# Altium PCB uart-keyboard.PcbDoc
Units mil, origin at the board's own origin, x right, y up, seen from the top; angles counter-clockwise.
Board outline 2000 x 2600 mil, 2 copper layers (Top Layer, Bottom Layer); 34 components, 24 nets, 127 pads, 13 vias.
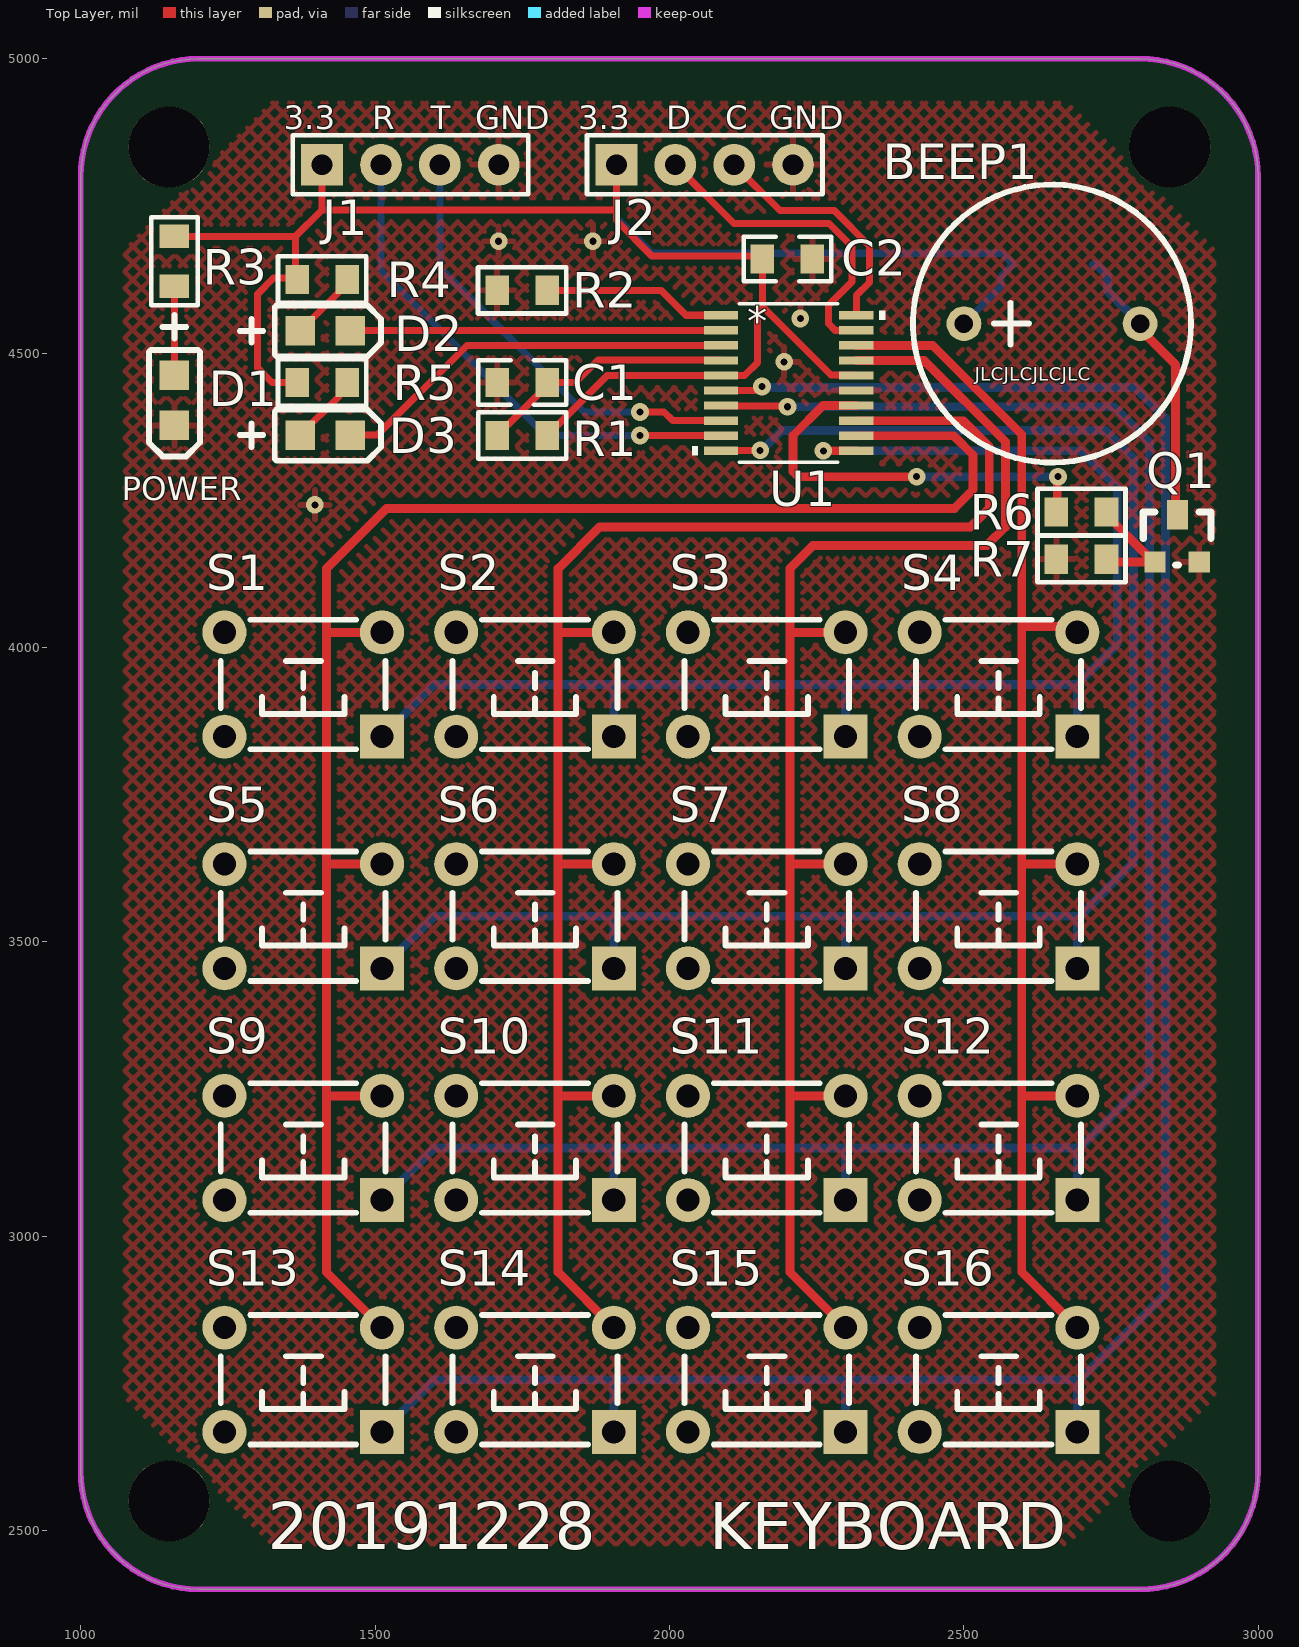
[diagram p0: Top Layer view]
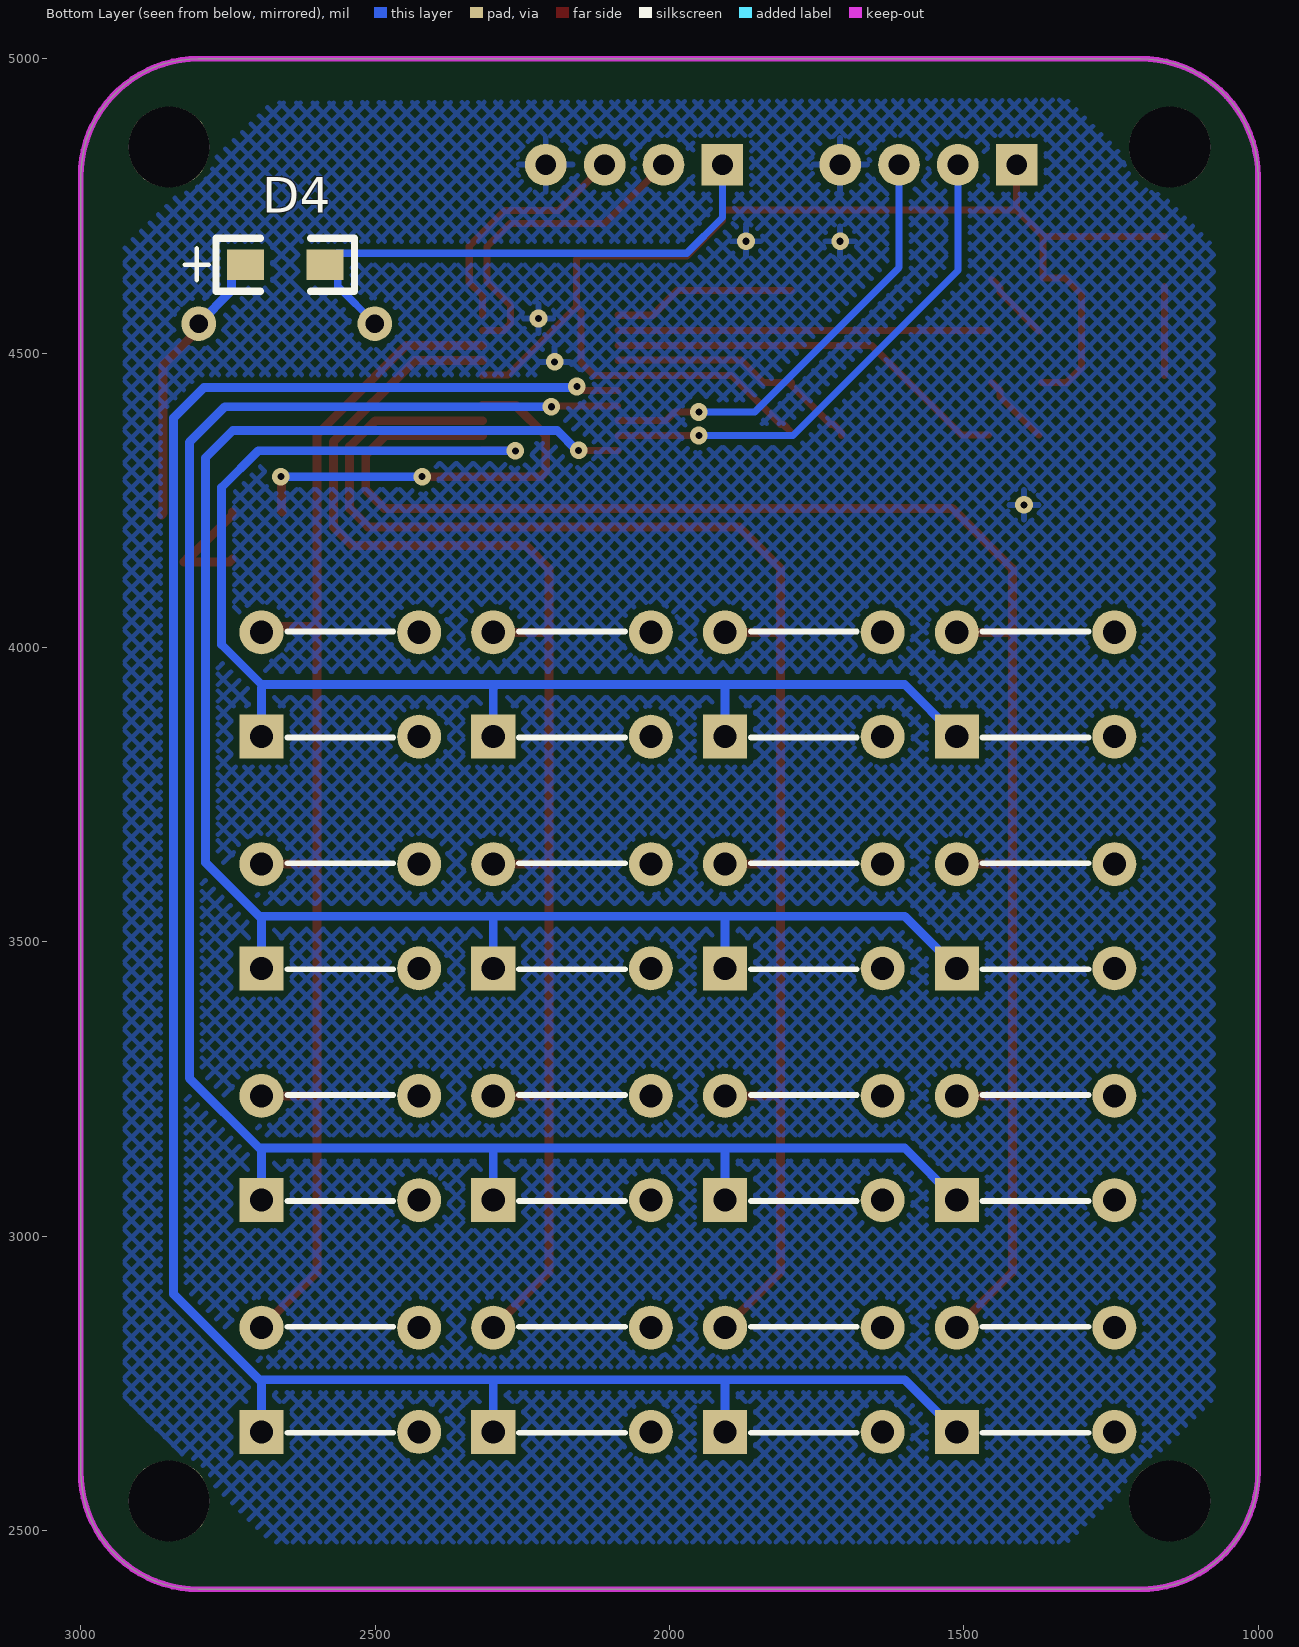
[diagram p1: Bottom Layer view, seen from below]
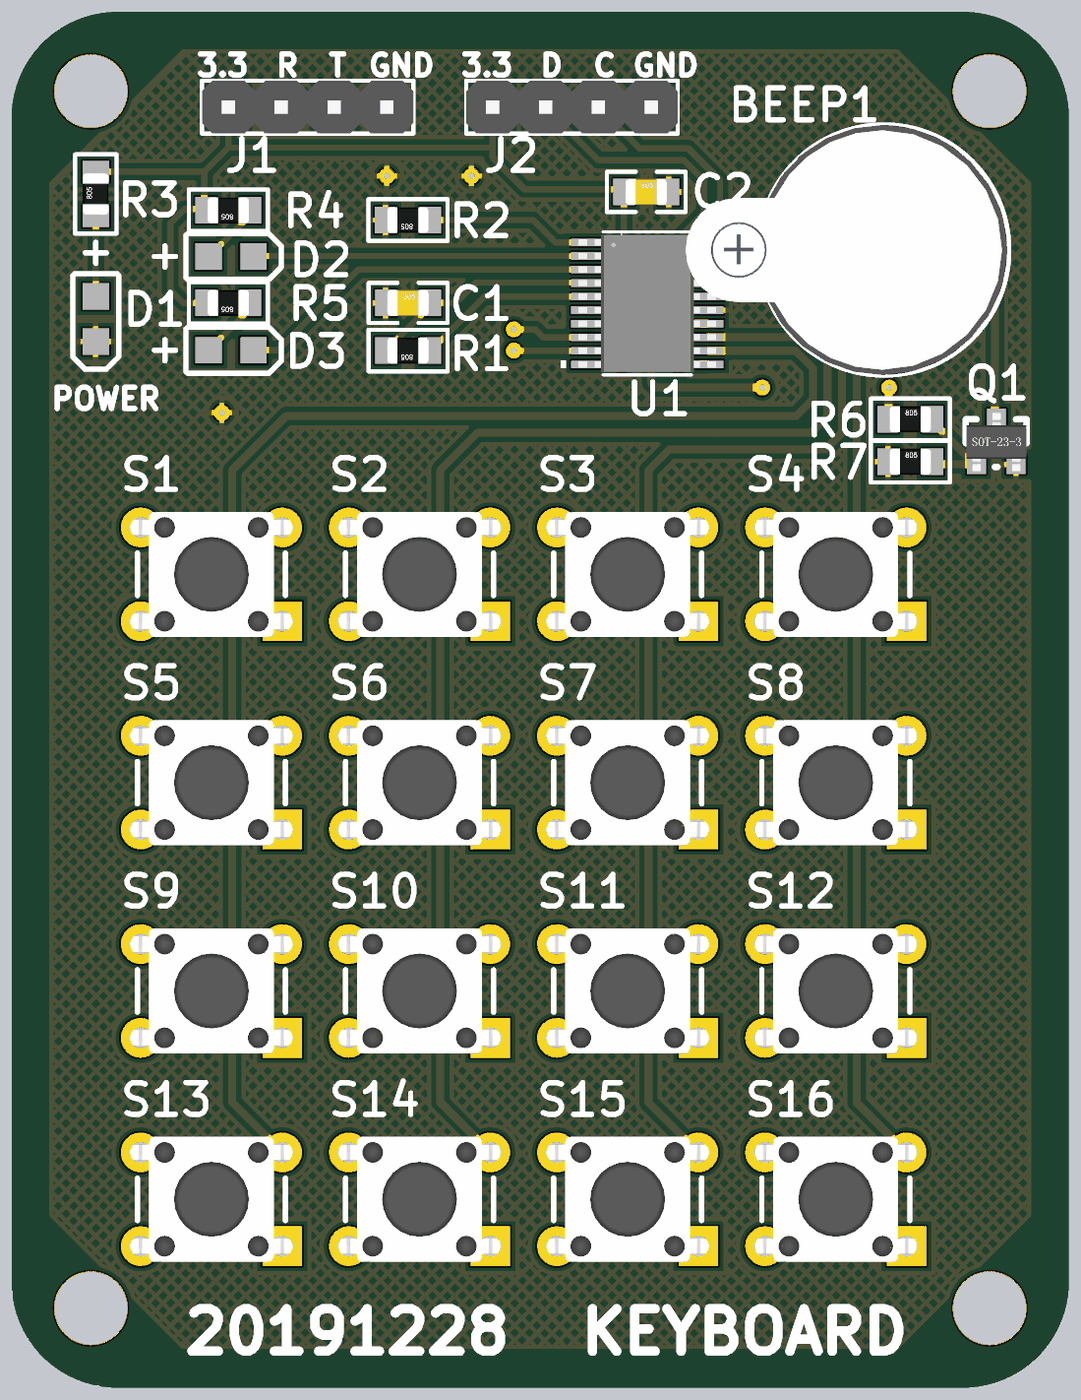
[diagram p2: 3D render of the assembled board from above, using the file's embedded part models]

## Layer stack, top to bottom
Top Solder: solder mask 0.4, Solder Resist, Dk 3.5
Top Layer: signal copper 1.4
Dielectric 1: dielectric 12.6, FR-4, Dk 4.8
Bottom Layer: signal copper 1.4
Bottom Solder: solder mask 0.4, Solder Resist, Dk 3.5

## Board outline
1000,2600 1000,4800 cw(c1200,4800) 1200,5000 2800,5000 cw(c2800,4800) 3000,4800 3000,2600 cw(c2800,2600) 2800,2400 1200,2400 cw(c1200,2600)

## Design rules (kind name [scope] priority, off if disabled: settings)
Clearance [All] p1: gap=10 ignorepadtopadclearanceinfootprint=FALSE except(0: Arc-Hole Track-Hole SMDPad-Hole THPad-Hole Via-Hole Fill-Hole Poly-Hole Region-Hole Text-Hole)
HoleSize [All] p1: absolutevalues=TRUE maxlimit=248.03 minlimit=11.81 maxpercent=80.000 minpercent=20.000
MinimumSolderMaskSliver [All] p1: minsoldermaskwidth=1
PolygonConnect [All] p1: connectstyle=Relief reliefconductorwidth=10 reliefentries=4 polygonreliefangle="90 Angle" airgapwidth=10
RoutingVias [All] p1: holewidth=28 width=50 viastyle="Through Hole" minholewidth=28 minwidth=50 maxholewidth=28 maxwidth=50
ShortCircuit [All] p1: allowed=TRUE
SilkToSilkClearance [All] p1: silktosilkclearance=0
SilkToSolderMaskClearance [IsPad] p1: minsilkscreentomaskgap=1 clearancetoexposedcopper=TRUE
SolderMaskExpansion [All] p1: expansion=4 istentingtop=FALSE
UnRoutedNet [All] p1: checkbadconnections=TRUE
Width [All] p1: maxlimit=25 minlimit=10 preferedwidth=25 minimp=50.000000 maximp=50.000000 favimp=50.000000
24 further rules are at their usual default settings.

## Components (designator, comment, footprint, x,y, rotation, side; value= is the part's Value field where it differs from the comment)
BEEP1 "BEEP-9.5X5.5" 蜂鸣器 2650,4550 r0 top
C1 "" 0805C 1750,4450 r0 top value=104
C2 "" 0805C 2200.55,4659.76 r0 top value=104
D1 "Power Instructions" LED0805 1159.21,4419.61 r270 top
D2 "" LED0805 1415.12,4537.72 r0 top
D3 "" LED0805 1415.12,4360.55 r0 top
D4 "IN4148" D4148 2720,4650 r180 bottom
J1 "PIN4" 排针1*4-2.54-直 1560,4820 r0 top
J2 "PIN4" 排针1*4-2.54-直 2060,4820 r0 top
Q1 "NPN" SOT-23-3 2860,4180 r0 top
R1 "" 0805R 1750,4360 r180 top value=10k
R2 "" 0805R 1749.76,4606.61 r180 top value=10k
R3 "" 0805R 1159.21,4655.83 r90 top value=2K
R4 "" 0805R 1410,4625 r180 top value=2K
R5 "" 0805R 1410,4450 r180 top value=2K
R6 "" 0805R 2700,4230 r0 top value=1K
R7 "" 0805R 2700,4150 r0 top value=10K
S1 "SW-PB" 轻触开关-6*6*5 1377.95,3937.01 r180 top
S2 "SW-PB" 轻触开关-6*6*5 1771.65,3937.01 r180 top
S3 "SW-PB" 轻触开关-6*6*5 2165.35,3937.01 r180 top
S4 "SW-PB" 轻触开关-6*6*5 2559.06,3937.01 r180 top
S5 "SW-PB" 轻触开关-6*6*5 1377.95,3543.31 r180 top
S6 "SW-PB" 轻触开关-6*6*5 1771.65,3543.31 r180 top
S7 "SW-PB" 轻触开关-6*6*5 2165.35,3543.31 r180 top
S8 "SW-PB" 轻触开关-6*6*5 2559.06,3543.31 r180 top
S9 "SW-PB" 轻触开关-6*6*5 1377.95,3149.61 r180 top
S10 "SW-PB" 轻触开关-6*6*5 1771.65,3149.61 r180 top
S11 "SW-PB" 轻触开关-6*6*5 2165.35,3149.61 r180 top
S12 "SW-PB" 轻触开关-6*6*5 2559.06,3149.61 r180 top
S13 "SW-PB" 轻触开关-6*6*5 1377.95,2755.91 r180 top
S14 "SW-PB" 轻触开关-6*6*5 1771.65,2755.91 r180 top
S15 "SW-PB" 轻触开关-6*6*5 2165.35,2755.91 r180 top
S16 "SW-PB" 轻触开关-6*6*5 2559.06,2755.91 r180 top
U1 "STM32F03xFxP" TSSOP20 2202.52,4449.13 r0 top value=Value

## Footprints (in the part's own frame and the unit in brackets; to place one, negate y for a bottom-side part, rotate by r counter-clockwise, add the part's x,y. Pads: shape width x height; smd on the part's side, far side on the other; paste and mask are expansions set on the pad)
0805C [mil]
  rect 40x50 smd: 1(-42.5,0) 2(42.5,0)
  silkscreen extent -74,-38 74,38, body extent -39,-25 39,25, height 30
0805R [mil]
  rect 40x50 smd: 1(-42.5,0) 2(42.5,0)
  silkscreen extent -75,-39 75,39, body extent -39,-25 40,25, height 30
D4148 [mm]
  rect 1.6x1.3 smd: 1(0,0) 2(3.429,0)
  silkscreen extent -2.63,-1.14 4.7,1.14
LED0805 [mil]
  rect 50x50 smd: 1(-42.5,0) 2(42.5,0)
  silkscreen extent -145,-43 95,43
SOT-23-3 [mil]
  rect 36x36 smd: B(-35,-35) E(40,-35)
  rect 36x50 smd: C(3,45)
  silkscreen extent -55,-40 60,50, body extent -54,-48 60,62, height 47
TSSOP20 [mil]
  rect 58x14 smd: 1(-115,115.16) 2(-115,89.57) 3(-115,63.98) 4(-115,38.39) 5(-115,12.8) 6(-115,-12.8) 7(-115,-38.39) 8(-115,-63.98) 9(-115,-89.57) 10(-115,-115.16) 11(115,-115.16) 12(115,-89.57) 13(115,-63.98) 14(115,-38.39) 15(115,-12.8) 16(115,12.8) 17(115,38.39) 18(115,63.98) 19(115,89.57) 20(115,115.16)
  silkscreen extent -164,-135 164,135, body extent -130,-130 130,130, height 47
排针1*4-2.54-直 [mm]
  rect 1.8x1.8 hole 0.9: 1(-3.81,0)
  round 1.8 hole 0.9: 2(-1.27,0) 3(1.27,0) 4(3.81,0)
  silkscreen extent -5.08,-1.27 5.08,1.27, body extent -5.08,-1.27 5.08,1.27, height 8.54
蜂鸣器 [mm]
  round 1.5 hole 0.8: 1(-3.8,0) 2(3.8,0)
  silkscreen extent -6,-6 6,6, body extent -9.53,-6 5.93,6, height 9.65
轻触开关-6*6*5 [mm] "6*6*5mm"
  rect 1.9x1.9 hole 1: 1(-3.4,2.25)
  round 1.9 hole 1: 2(-3.4,-2.25) 3(3.4,-2.25) 4(3.4,2.25)
  silkscreen extent -3.56,-2.79 3.56,2.79, body extent -4.11,-3 4.11,3, height 4.95

## Part data
C1 C2: library part Cap, "Capacitor", LatestRevisionDate=17-Jul-2002, LatestRevisionNote="Re-released for DXP Platform.", PackageDescription="Radial Cap, Thru-Hole; 2 Leads; 0.3 in Pin Spacing", PackageReference=RAD-0.3, Published=8-Jun-2000, Publisher="Altium Limited"
D1 D2 D3: library part LED2, "Typical RED, GREEN, YELLOW, AMBER GaAs LED", LatestRevisionDate=17-Jul-2002, LatestRevisionNote="Re-released for DXP Platform.", PackageDescription="SM LED; 2 Flat Leads", PackageReference=3.2X1.6X1.1, PackageVersion=Feb-2002, Published=8-Jun-2000, Publisher="Altium Limited"
Q1: "NPN Bipolar Transistor", Code_JEDEC=TO-226-AA, LatestRevisionDate=17-Jul-2002, LatestRevisionNote="Re-released for DXP Platform.", PackageDescription="TO, Flat Index; 3 In-Line, Axial Leads; Body Dia. 4.8mm; Leads 0.55 x 0.51 mm (max)", PackageReference=TO-226-AA, Published=8-Jun-2000, Publisher="Altium Limited"
R1 R2 R3 R4 R5 R6 R7: library part Res2, "Resistor", LatestRevisionDate=17-Jul-2002, LatestRevisionNote="Re-released for DXP Platform.", PackageDescription="Axial Device, Thru-Hole; 2 Leads; 0.4 in Pin Spacing", PackageReference=AXIAL-0.4, Published=8-Jun-2000, Publisher="Altium Limited"
S1 S2 S3 S4 S5 S6 S7 S8 S9 S10 S11 S12 S13 S14 S15 S16: "Switch", LatestRevisionDate=17-Jul-2002, LatestRevisionNote="Re-released for DXP Platform.", PackageDescription="Switch; 2 Leads", PackageReference=SPST-2, Published=24-Mar-1999, Publisher="Altium Limited"
U1: "Imported", Manufacturer_Part_Number=stm32f03xfxp, C="Copyright (C) 2016 Accelerated Designs. All rights reserved", Copyright="Copyright (C) 2016 Accelerated Designs. All rights reserved", RefDes=RefDes, TYPE=Type, Vendor=STMicroelectronics
BEEP1: PCB DECAL=BEEP-9.5X5.5

## Free pads (board coordinates)
  round 137.8 hole 137.8: 3(1150,2550) 3(1150,4850) 3(2850,2550) 3(2850,4850)

## Via types
v1: diameter 30, hole 12, Top Layer to Bottom Layer, 13 vias

## Nets (pads, with @x,y where several pads share a name; then routed paths per layer and width w, separated by ;. In a path a pad name is that pad's centre, name@x,y a point inside that pad or via, vN(x,y) a via of type N, cw(c..) or ccw(c..) an arc to the next point about the centre after c; other vN are vias at no path point)
3.3V: BEEP1.1 C2.1 D4.2 J1.1 J2.1 R1.1 R3.2 R4.2 R5.2 U1.5 U1.16 | length 3300.9
  Top Layer w12: R3.2 1365,4698.33 ; 1334.97,4449.97 1325.03,4449.97 1300,4475 1300,4600 1327.5,4627.5 1365,4627.5 1365,4698.33 ; 1335,4450 R5.2 ; J1.1 1410,4743.33 ; R1.1 1792.5,4365 1806.5,4379 1811.5,4379 1894.43,4461.93 U1.5 2127.72,4461.93 2150,4484.21 2150,4571.29 2158.05,4579.34 ; J2.1 1910,4740 ; U1.16 2316.52,4462.93 2274.46,4462.93 2158.05,4579.34 ; 1365,4698.33 1410,4743.33 ; 1410,4743.33 1906.67,4743.33 1910,4740 ; 1910,4740 1910,4725 1970,4665 2152.82,4665 C2.1 2158.05,4579.34
  Bottom Layer w12: J2.1 1910,4730 1970.41,4669.59 2565.41,4669.59 D4.2 2583.03,4650 2563.44,4630.41 2563.44,4613.44 2500.39,4550.39 BEEP1.1
BOOT0: R2.1 U1.1 | length 312.8
  Top Layer w12: R2.1 1985.98,4606.61 2028.31,4564.29 U1.1
GND: C1.1 C2.2 D1.2 J1.4 J2.4 Q1.E R2.2 R7.1 U1.15
  other v1: 1397.64,4242.13 2195,4485 2222.45,4558.78 1710,4690 1870,4690
KEY_IN1: S1.2 S5.2 S9.2 S13.2 U1.12 | length 3036.7
  Top Layer w15: S13.2 1417.32,2938.98 1417.32,3238.19 ; S9.2 1417.32,3238.19 ; S5.2 1417.32,3631.89 ; S1.2 1417.32,4025.59 ; U1.12 2482.95,4359.57 2515.75,4326.77 2515.75,4267.72 2484.25,4236.22 1519.69,4236.22 1417.32,4133.86 1417.32,4025.59 ; 1417.32,3238.19 1417.32,3631.89 ; 1417.32,3631.89 1417.32,4025.59
KEY_IN2: S2.2 S6.2 S10.2 S14.2 U1.13 | length 2735.7
  Top Layer w15: S14.2 1811.02,2938.98 1811.02,3238.19 ; S10.2 1811.02,3238.19 ; S6.2 1811.02,3631.89 ; S2.2 1811.02,4025.59 ; U1.13 2499.49,4385.16 2543.31,4341.34 2543.31,4236.22 2511.81,4204.72 1881.89,4204.72 1811.02,4133.86 1811.02,4025.59 ; 1811.02,3238.19 1811.02,3631.89 ; 1811.02,3631.89 1811.02,4025.59
KEY_IN3: S3.2 S7.2 S11.2 S15.2 U1.17 | length 2462.5
  Top Layer w15: S15.2 2204.72,2938.98 2204.72,3238.19 ; S11.2 2204.72,3238.19 ; S7.2 2204.72,3631.89 ; S3.2 2204.72,4025.59 ; U1.17 2400.35,4487.52 2400.61,4487.27 2432.73,4487.27 2570.87,4349.13 2570.87,4204.72 2539.37,4173.23 2244.09,4173.23 2204.72,4133.86 2204.72,4025.59 ; 2204.72,3238.19 2204.72,3631.89 ; 2204.72,3631.89 2204.72,4025.59
KEY_IN4: S4.2 S8.2 S12.2 S16.2 U1.18 | length 2187.4
  Top Layer w15: U1.18 2446.89,4513.11 2598.43,4361.57 2598.43,4035.43 ; S16.2 2598.43,2938.98 2598.43,3238.19 ; S12.2 2598.43,3238.19 ; S8.2 2598.43,3631.89 ; S4.2 2683.07,4035.43 2598.43,4035.43 ; 2598.43,3238.19 2598.43,3631.89 ; 2598.43,3631.89 2598.43,4035.43
KEY_OUT1: S1.1 S2.1 S3.1 S4.1 U1.11 | length 2473.4
  Top Layer w15: v1(2261.57,4333.98) U1.11
  Bottom Layer w15: S1.1 1600.39,3937.01 1909.45,3937.01 ; S2.1 1905.51,3933.07 1909.45,3937.01 ; v1(2261.57,4333.98) 2698.5,4333.98 2760.83,4271.65 2760.83,4004.92 2692.91,3937.01 2687.01,3937.01 ; S3.1 2299.21,3931.1 2293.31,3937.01 ; S4.1@2720.89,3876.4 S4.1 2692.91,3931.1 2687.01,3937.01 ; 1909.45,3937.01 2293.31,3937.01 ; 2293.31,3937.01 2687.01,3937.01
KEY_OUT2: S5.1 S6.1 S7.1 S8.1 U1.10 | length 3040.8
  Top Layer w12: U1.10 2087.87,4334.33 2153.71,4334.33 v1(2154.06,4334.68)
  Bottom Layer w15: S5.1 1600.39,3543.31 1909.45,3543.31 ; S6.1 1905.51,3539.37 1909.45,3543.31 ; v1@2156.26,4334.96 2157.24,4334.96 2190.71,4368.43 2741.57,4368.43 2788.19,4321.81 ; S7.1 2299.21,3539.37 2303.15,3543.31 ; S8.1 2692.91,3539.37 2696.85,3543.31 ; 2788.31,4321.93 2788.31,3634.77 2696.85,3543.31 ; 1909.45,3543.31 2303.15,3543.31 ; 2303.15,3543.31 2696.85,3543.31
KEY_OUT3: S9.1 S10.1 S11.1 S12.1 U1.7 | length 3493.4
  Top Layer w12: U1.7@2088.02,4410.25 v1@2199.08,4410.25
  Top Layer w15: v1@2199.08,4410.25 v1(2200.55,4408.78)
  Bottom Layer w15: S9.1 1600.39,3149.61 1909.45,3149.61 ; S10.1 1905.51,3145.67 1909.45,3149.61 ; v1(2200.55,4408.78) 2755.18,4408.78 2815.49,4348.48 2815.49,3268.24 2696.85,3149.61 ; S11.1 2299.21,3145.67 2303.15,3149.61 ; S12.1 2692.91,3145.67 2696.85,3149.61 ; 1909.45,3149.61 2303.15,3149.61 ; 2303.15,3149.61 2696.85,3149.61
KEY_OUT4: S13.1 S14.1 S15.1 S16.1 U1.6 | length 3966.6
  Top Layer w12: U1.6 2145.47,4436.34 2152.38,4443.25 v1(2157.25,4443.25)
  Bottom Layer w15: S13.1 1600.39,2755.91 1909.45,2755.91 ; S14.1 1905.51,2751.97 1909.45,2755.91 ; v1(2157.25,4443.25) 2159.22,4441.28 2790.86,4441.28 2842.67,4389.47 2842.67,2901.72 2696.85,2755.91 ; S15.1 2299.21,2751.97 2303.15,2755.91 ; S16.1 2692.91,2751.97 2696.85,2755.91 ; 1909.45,2755.91 2303.15,2755.91 ; 2303.15,2755.91 2696.85,2755.91
NetBEEP1_2: BEEP1.2 D4.1 Q1.C | length 491.4
  Top Layer w15: BEEP1.2 2799.61,4540.39 2860,4480 2860,4228 Q1.C
  Bottom Layer w15: D4.1 2725.91,4650 2744,4631.91 2744,4605.61 BEEP1.2 BEEP1.2@2795.91,4550
NetD1_1: D1.1 R3.1 | length 151.2
  Top Layer w12: D1.1 R3.1
NetD2_1: D2.1 R4.1 | length 120.4
  Top Layer w12: D2.1 1438.5,4603.6 1438.5,4611 R4.1
NetD3_1: D3.1 R5.1 | length 122.5
  Top Layer w12: D3.1 1438.5,4426.43 1438.5,4436 R5.1
NetQ1_B: Q1.B R6.2 R7.2 | length 205.2
  Top Layer w15: R7.2 2747.5,4145 Q1.B 2814.5,4155.5 2812,4155.5 2742.5,4225 R6.2
NRST: C1.2 R1.2 U1.4 | length 441.6
  Top Layer w12: R1.2 1707.5,4365 1721.5,4379 1726.5,4379 C1.2@1792.5,4445 ; C1.2 C1.2@1792.5,4445 ; U1.4 2086.54,4488.5 1878.5,4488.5 1840,4450 1797.5,4450 C1.2@1792.5,4445
PB1_BEEP: R6.1 U1.14 | length 704.4
  Top Layer w15: U1.14 2260.75,4410.75 2210,4360 2210,4298.79 2218.79,4290 v1(2420,4290) ; R6.1 2658.75,4231.25 2658.75,4288.75 v1(2660,4290)
  Bottom Layer w15: v1(2420,4290) v1(2660,4290)
PF0_LED: D2.2 U1.2 | length 630.3
  Top Layer w12: D2.2 1458.6,4538.7 U1.2
PF1_LED: D3.2 U1.3 | length 693.1
  Top Layer w12: D3.2 1503.7,4360.55 1656.26,4513.11 U1.3
SWCLK: J2.3 U1.20 | length 414.2
  Top Layer w12: J2.3 2188,4742 2280,4742 2340,4682 2340,4620 2317.52,4597.52 U1.20
SWDIO: J2.2 U1.19 | length 557.3
  Top Layer w12: J2.2 2110,4720 2270.89,4720 2310,4680.89 2310,4621.11 2270,4581.11 2270,4550 2281.3,4538.7 U1.19
USART_RX: J1.2 U1.9 | length 873.7
  Top Layer w12: v1(1950,4360) 1950.22,4359.78 2087.3,4359.78 U1.9
  Bottom Layer w12: J1.2 1510,4640 1790,4360 v1(1950,4360)
USART_TX: J1.3 U1.8 | length 760.2
  Top Layer w12: v1(1950,4400) 1991,4400 2005.92,4385.08 2087.44,4385.08 U1.8
  Bottom Layer w12: J1.3 1610,4645 1855,4400 v1(1950,4400)
pads on no net: S1.3 S1.4 S2.3 S2.4 S3.3 S3.4 S4.3 S4.4 S5.3 S5.4 S6.3 S6.4 S7.3 S7.4 S8.3 S8.4 S9.3 S9.4 S10.3 S10.4 S11.3 S11.4 S12.3 S12.4 S13.3 S13.4 S14.3 S14.4 S15.3 S15.4 S16.3 S16.4

## Polygon pours and split planes (outlines as drawn)
GND on Top Layer "GND_L01_P001" (hatched 45Degree grid 20 track 8, remove dead copper, pour order 1): 1325,4925 1075,4675 1075,2727.05 1325,2477.05 2675,2477.05 2925,2727.05 2925,4675 2675,4925
no net on Top Layer "NONET_L01_P000" (solid, pour order 0): 1200,5000
GND on Bottom Layer "GND_L02_P003" (hatched 45Degree grid 20 track 8, remove dead copper, pour order 3): 1325,4930.01 1075.06,4680.07 1075.06,2725 1325,2480.01 2675,2480.01 2925,2725 2925,4680.01 2675,4925

## Keep-outs
Keep-Out Layer:
  the board outline again, w10

## Silkscreen, mask and mechanical layers (free items; w line width, h text height)
Top Overlay:
  text "3.3" at 1345,4880 h40
  text "R" at 1495,4880 h40
  text "T" at 1595,4880 h40
  text "GND" at 1670,4880 h40
  text "3.3" at 1845,4880 h40
  text "D" at 1995,4880 h40
  text "C" at 2095,4880 h40
  text "GND" at 2170,4880 h40
  text "JLCJLCJLCJLC" at 2518.72,4445.52 h39.37
  text "POWER" at 1070,4250 h40
  text "20191228" at 1318,2468 h80
  text "KEYBOARD" at 2068,2468 h80

## Text inside footprints (layer, text, board x,y; h text height)
U1: Top Overlay "*" at 2132.52,4529.13 h50; Mechanical 13 "*" at 2132.52,4534.13 h50